# Altium PCB motorvezerlo.PcbDoc
Units mm, origin at the board's own origin, x right, y up, seen from the top; angles counter-clockwise.
Board outline 102.49 x 59.18 mm, 2 copper layers (Top Layer, Bottom Layer), stack 1.586 mm thick; 35 components, 23 nets, 92 pads, 57 vias.
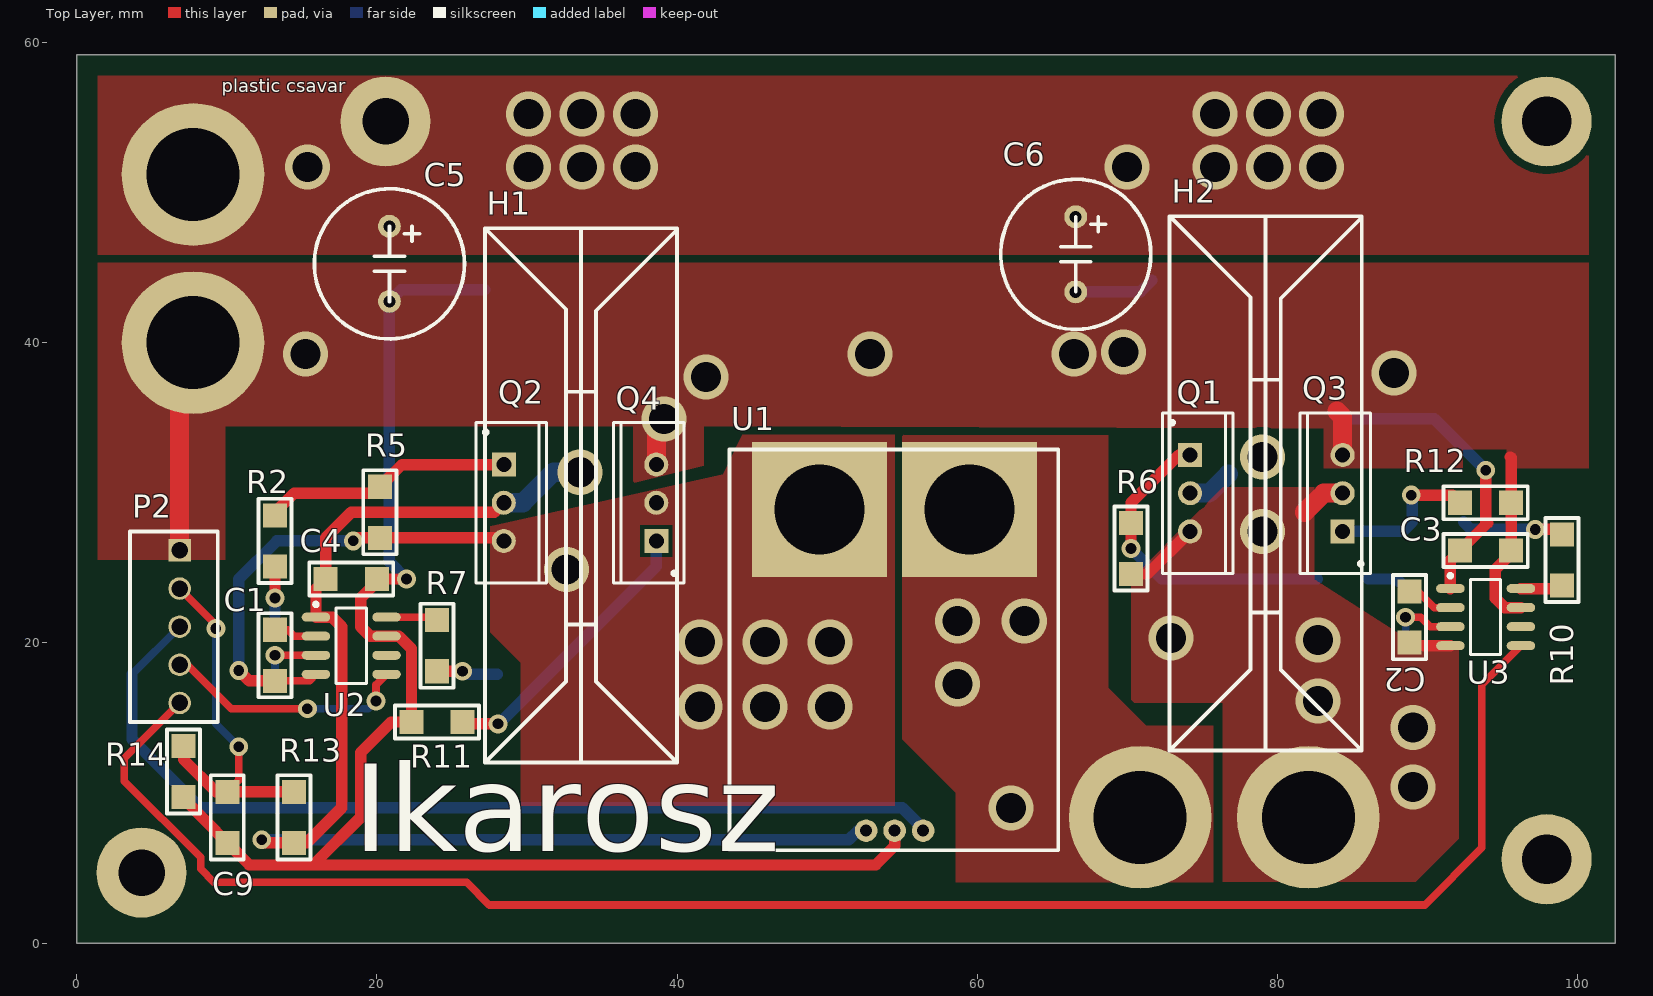
[diagram p0: Top Layer view]
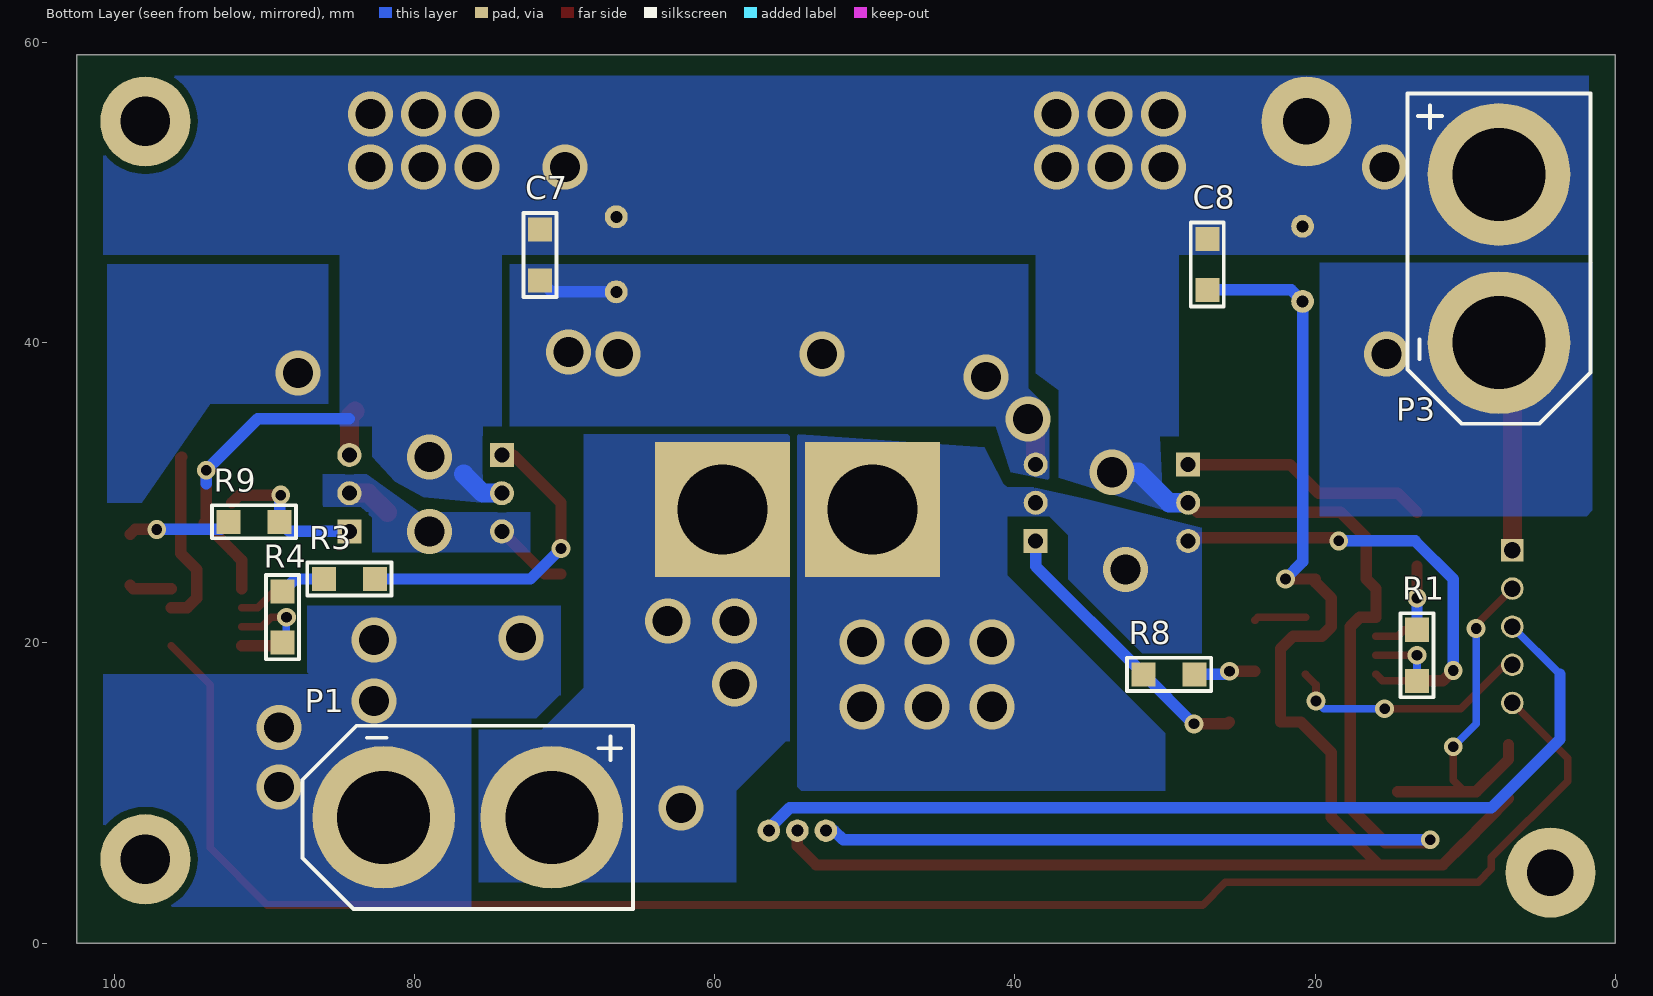
[diagram p1: Bottom Layer view, seen from below]
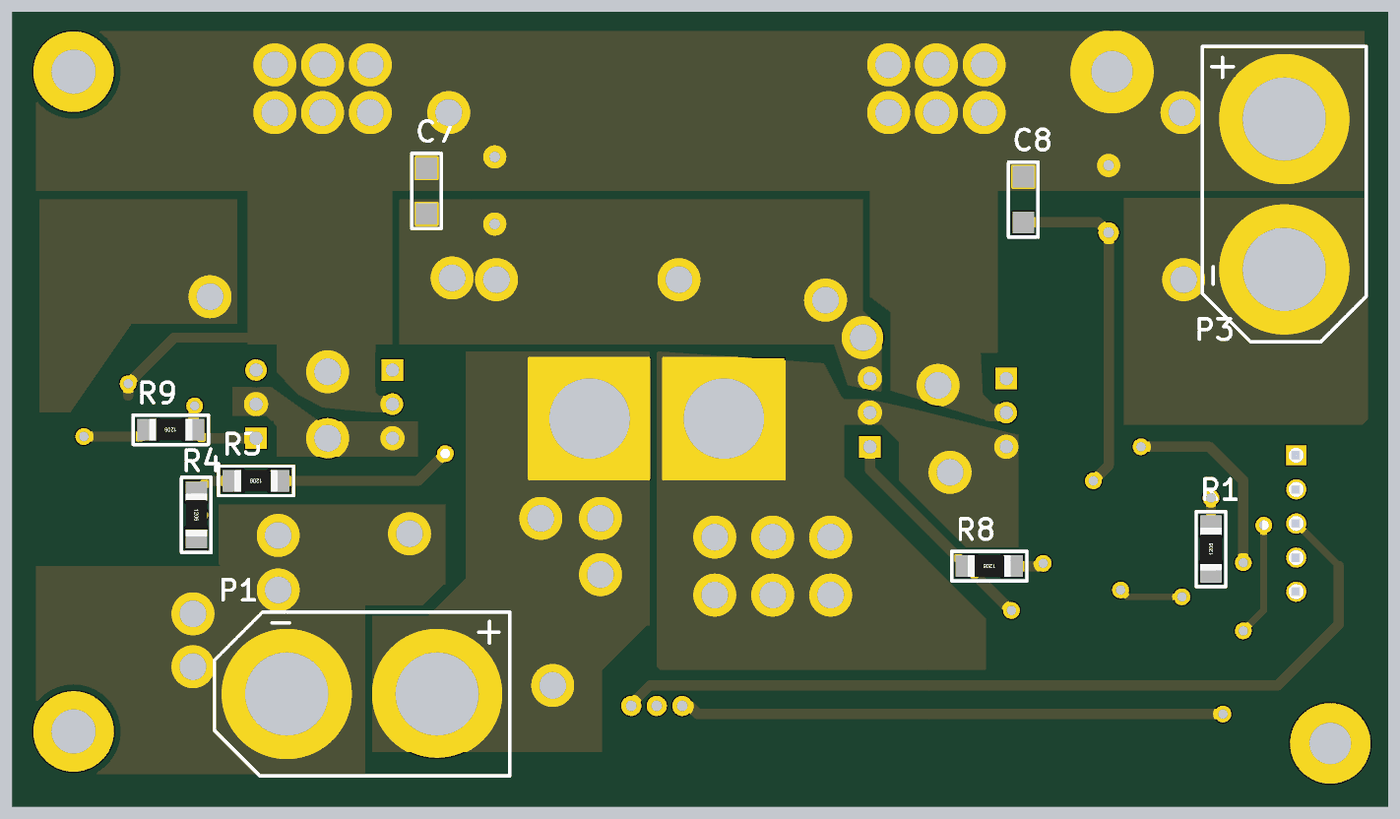
[diagram p2: 3D render of the assembled board from below, using the file's embedded part models]

## Layer stack, top to bottom
Top Solder: solder mask 0.0102, Solder Resist, Dk 3.5
Top Layer: signal copper 0.018
Dielectric1: core 1.55, FR-4, Dk 4.8
Bottom Layer: signal copper 0.018
Bottom Solder: solder mask 0.0102, Solder Resist, Dk 3.5

## Board outline
0,0 0,59.182 102.489,59.182 102.489,0

## Design rules (kind name [scope] priority, off if disabled: settings)
BoardOutlineClearance [All] p1: gap=0.25 ignorepadtopadclearanceinfootprint=FALSE except(0: Arc-SplitContinuation Track-SplitContinuation SMDPad-SplitContinuation THPad-SplitContinuation Via-SplitContinuation Fill-SplitContinuation Poly-SplitContinuation Region-SplitContinuation Text-SplitContinuation)
Clearance Clearance_4 [InNamedPolygon('Motor2')] p1: gap=0.5 ignorepadtopadclearanceinfootprint=FALSE
Clearance Clearance_3 [InNamedPolygon('MVCC')] p2: gap=0.5 ignorepadtopadclearanceinfootprint=FALSE
Clearance Clearance_2 [InNamedPolygon('Motor1')] p3: gap=0.254 ignorepadtopadclearanceinfootprint=FALSE except(0: Arc-Hole Track-Hole SMDPad-Hole THPad-Hole Via-Hole Fill-Hole Poly-Hole Region-Hole Text-Hole)
Clearance Clearance_1 [InNamedPolygon('NetP1_P')] p4: gap=0.5 ignorepadtopadclearanceinfootprint=FALSE
Clearance [InNamedPolygon('GND')] p5: gap=0.5 ignorepadtopadclearanceinfootprint=FALSE
Clearance Clearance-xPP-xTP-xTT [All] p6: gap=0.15 ignorepadtopadclearanceinfootprint=FALSE except(0: Arc-Hole Track-Hole SMDPad-Hole THPad-Hole Via-Hole Fill-Hole Poly-Hole Region-Hole Text-Hole)
ComponentClearance [All] p1: gap=0.25 collisioncheckmode=3 verticalgap=0.25 showdistances=FALSE
DiffPairsRouting [All] p1: maxlimit=0.25 minlimit=0.25 mostfreqgap=0.25 toplayer_minwidth=0.381 toplayer_maxwidth=0.381 toplayer_prefwidth=0.381 bottomlayer_minwidth=0.381 bottomlayer_maxwidth=0.381 bottomlayer_prefwidth=0.381 maxuncoupledlength=12.5
Height [All] p1: minheight=0 maxheight=25 prefheight=12.5
HoleSize HoleSize-PTH [All] p1: absolutevalues=TRUE maxlimit=2 minlimit=0.25 maxpercent=80.000 minpercent=20.000
HoleToHoleClearance [All] p1: gap=0.35 allowstackedmicrovias=TRUE
MinimumAnnularRing "Minimum IAR  >0.45mm" [((ObjectKind = 'Pad') OR (ObjectKind = 'Via')) And (Layer = 'MultiLayer') And (HoleDiameter > AsMM(0.45))] p1: minimumring=0.175 // minimum inner annular ring for pads > 0.45mm finished hole size
MinimumAnnularRing "Minimum IAR <=0.45mm" [((ObjectKind = 'Pad') OR (ObjectKind = 'Via')) And (Layer = 'MultiLayer') And (HoleDiameter <= AsMM(0.45))] p2: minimumring=0.175 // minimum inner annular ring for pads <= 0.45mm finished hole size
MinimumSolderMaskSliver [All] p1: minsoldermaskwidth=0.08
PlaneClearance PlaneClearance-IPI [All] p1: clearance=0.25
PlaneConnect [All] p1: planeconnectstyle=Direct reliefexpansion=0.175 reliefentries=4 reliefconductorwidth=0.2 reliefairgap=0.2
PolygonConnect PolygonConnect_5 [All vs IsNamedPolygon('Motor1')] p1: connectstyle=Direct reliefconductorwidth=0.254 reliefentries=4 polygonreliefangle="90 Angle" airgapwidth=0.254
PolygonConnect PolygonConnect_4 [All vs IsNamedPolygon('NetP1_P')] p2: connectstyle=Direct reliefconductorwidth=0.254 reliefentries=4 polygonreliefangle="90 Angle" airgapwidth=0.254
PolygonConnect PolygonConnect_3 [All vs IsNamedPolygon('Motor1')] p3: connectstyle=Direct reliefconductorwidth=0.254 reliefentries=4 polygonreliefangle="90 Angle" airgapwidth=0.254
PolygonConnect PolygonConnect_2 [All vs IsNamedPolygon('Motor2')] p4: connectstyle=Direct reliefconductorwidth=0.254 reliefentries=4 polygonreliefangle="90 Angle" airgapwidth=0.254
PolygonConnect PolygonConnect_1 [All vs IsNamedPolygon('GND')] p5: connectstyle=Direct reliefconductorwidth=0.254 reliefentries=4 polygonreliefangle="90 Angle" airgapwidth=0.254
PolygonConnect [All vs IsNamedPolygon('MVCC')] p6: connectstyle=Direct reliefconductorwidth=0.254 reliefentries=4 polygonreliefangle="90 Angle" airgapwidth=0.254
PolygonConnect PolygonConnect-xTW [All] p7: connectstyle=Direct reliefconductorwidth=0.2 reliefentries=4 polygonreliefangle="90 Angle" airgapwidth=0.2
RoutingCorners [All] p1: cornerstyle=45-Degree minsetback=2.5 maxsetback=2.5
RoutingVias "RoutingVias > 0.45mm" [(ObjectKind = 'Via') And (HoleDiameter > AsMM(0.45))] p1: holewidth=0.5 width=0.85 viastyle="Through Hole" minholewidth=0.5 minwidth=0.85 maxholewidth=3 maxwidth=4 // finishet hole size > 0.45mm
RoutingVias "RoutingVias <= 0.45mm" [(ObjectKind = 'Via') And (HoleDiameter <= AsMM(0.45))] p2: holewidth=0.3 width=0.65 viastyle="Through Hole" minholewidth=0.25 minwidth=0.6 maxholewidth=0.45 maxwidth=0.8 // finishet hole size <= 0.45mm
SilkToSilkClearance [All] p1: silktosilkclearance=0.2
SilkToSolderMaskClearance SilkscreenOverComponentPads [IsPad] p1: minsilkscreentomaskgap=0.2 clearancetoexposedcopper=TRUE
SolderMaskExpansion [All] p1: expansion=0.1
UnRoutedNet [All] p1: checkbadconnections=TRUE
Width Width-xTW [All] p1: maxlimit=1.5 minlimit=0.15 preferedwidth=0.2
18 further rules are at their usual default settings.

## Components (designator, comment, footprint, x,y, rotation, side; value= is the part's Value field where it differs from the comment)
C1 "220nF" FP_1206_CAP_125 13.208,19.177 r90 top
C2 "220nF" FP_1206_CAP_125 88.773,21.717 r270 top
C3 "4u7" FP_1206_CAP_125 93.853,26.162 r180 top
C4 "4u7" FP_1206_CAP_125 18.288,24.257 r180 top
C5 "220uF" THT_ELKO_10x16 20.828,47.752 r270 top
C6 "220uF" THT_ELKO_10x16 66.548,48.387 r270 top
C7 "4u7" FP_1206_CAP_125 71.628,45.847 r90 bottom
C8 "4u7" FP_1206_CAP_125 27.178,45.212 r90 bottom
C9 "68nF" FP_1206_CAP_125 10.033,8.382 r90 top
H1 "TO220_Heatsink" TO220_HEATSINK 39.993,12.027 r90 top
H2 "TO220_Heatsink" TO220_HEATSINK 85.598,12.827 r90 top
P1 "Motor" CONN_XT90 82.042,8.382 r180 bottom
P2 "Mainboard" FP_CONN5_TAP_254MM 6.858,26.162 r180 top
P3 "Motor akksi" CONN_XT90 7.747,40.005 r90 bottom
Q1 "AUIRF1324" TO-220AB 74.168,29.972 r270 top
Q2 "AUIRF1324" TO-220AB 28.448,29.337 r270 top
Q3 "AUIRF1324" TO-220AB 84.328,29.972 r90 top
Q4 "AUIRF1324" TO-220AB 38.608,29.337 r90 top
R1 "10R" FP_1206_RES 13.208,19.177 r90 bottom
R2 "0R" FP_1206_RES 13.208,26.797 r90 top
R3 "10R" FP_1206_RES 84.328,24.257 r0 bottom
R4 "0R" FP_1206_RES 88.773,21.717 r270 bottom
R5 "3K3" FP_1206_RES 20.193,28.702 r90 top
R6 "3K3" FP_1206_RES 70.231,26.289 r90 top
R7 "10R" FP_1206_RES 24.003,19.812 r270 top
R8 "0R" FP_1206_RES 29.718,17.907 r0 bottom
R9 "10R" FP_1206_RES 90.678,28.067 r0 bottom
R10 "0R" FP_1206_RES 98.933,25.527 r270 top
R11 "3K3" FP_1206_RES 24.003,14.732 r0 top
R12 "3K3" FP_1206_RES 93.853,29.337 r180 top
R13 "43K" FP_1206_RES 14.478,8.382 r270 top
R14 "27K" FP_1206_RES 7.112,11.43 r90 top
U1 "ACS758LCB-100B" ACS758LCB-5pin-PFF 54.483,7.493 r0 top
U2 "MIC4605-2" FP_SOIC8_N 18.288,19.812 r0 top
U3 "MIC4605-2" FP_SOIC8_N 93.853,21.717 r0 top

## Footprints (in the part's own frame and the unit in brackets; to place one, negate y for a bottom-side part, rotate by r counter-clockwise, add the part's x,y. Pads: shape width x height; smd on the part's side, far side on the other; paste and mask are expansions set on the pad)
ACS758LCB-5pin-PFF [mm]
  round 1.5 hole 0.8: 1(-1.9,0) 2(0,0) 3(1.9,0)
  rect 9x9 hole 6: 4(5,21.4) 5(-5,21.4)
  silkscreen extent -11,-1.3 10.9,25.4
CONN_XT90 [mm]
  round 9.5 hole 6.2: N(0,0) P(11.2,0)
  silkscreen extent -5.4,-6.1 16.6,6.1
FP_1206_CAP_125 [mm] "1206 kapacitás 1.25 mm"
  rect 1.6x1.6 smd: 1(-1.7,0) 2(1.7,0)
  silkscreen extent -2.8,-1.1 2.8,1.1, body extent -1.52,-0.79 1.58,0.79, height 1.25
FP_1206_RES [mm] "1206 ellenállás"
  rect 1.6x1.6 smd: 1(-1.7,0) 2(1.7,0)
  silkscreen extent -2.8,-1.1 2.8,1.1, body extent -1.6,-0.8 1.6,0.8, height 0.62
FP_CONN5_TAP_254MM [mm] "álló öt pólusú tápcsatlakozó 2.54mm"
  rect 1.5x1.5 hole 1.1: 1(0,0)
  round 1.5 hole 1.1: 2(0,2.54) 3(0,5.08) 4(0,7.62) 5(0,10.16)
  silkscreen extent -2.54,-1.27 3.3,11.43, body extent -2.54,-1.27 3.26,11.43, height 11.56
FP_SOIC8_N [mm]
  oval 1.9x0.6 smd: 1(-2.35,1.905) 2(-2.35,0.635) 3(-2.35,-0.635) 4(-2.35,-1.905) 5(2.35,-1.905) 6(2.35,-0.635) 7(2.35,0.635) 8(2.35,1.905)
  silkscreen extent -2.47,-2.5 1,2.88, body extent -2,-2.5 2,2.5, height 1.75
THT_ELKO_10x16 [mil]
  round 60 hole 31.5: N(196.85,0) P(0,0)
  silkscreen extent -98,-197 295,197
TO220_HEATSINK [mm]
  silkscreen extent 0,0 35.6,12.8
TO-220AB [mm] "TO, Thru-Hole, Vertical, Heatsink Mounted; 3 In-Line Leads; Pitch 2.54 mm"
  rect 1.6x1.6 hole 1: 1(-2.54,0)
  round 1.6 hole 1: 2(0,0) 3(2.54,0)
  silkscreen extent -5.35,-1.85 5.35,2.85, body extent -5.4,-1.9 5.4,2.9, height 19.3

## Part data
C1 C2 C3 C4 C7 C8 C9: library part CAP, "Capacitor", Supplier=Lomex
  C1 C2: Name="220nF 1206 10% 50V X7R CL31B224KBFNNNE (SAM)", Reference=82-09-87
  C3 C4 C7 C8: Name="4.7uF 1206 10% 25V X7R CL31B475KAHNNNE (SAM)", Reference=82-06-22
  C9: Name="68nF 1206 10% 50V X7R CC1206KRX7R9BB683 (YAG)", Reference=82-00-17
C5 C6: library part CAP_ELECT, "Polarized Capacitor", Name="220uF 50V 10x16 RM 5.0 20% 105° 10000h KTC227M050S1G6H16K (TEA) LOW ESR & IMP. HIGH RIPPLE, LONG LIFE", Reference=12-21-33, Supplier=Lomex
H1 H2: "TO220 Heatsink", Name="HÛTÕBORDA TO-220 35.6x 25.4x12.8mm ALUPROFIL ELOXÁLT", Reference=22-00-40, Supplier=Lomex
P1 P3: library part Connector_2pinPolarized, "2 pin polarized connector"
P2: library part Connector_5pin, "5pin Connector"
Q1 Q2 Q3 Q4: library part NMOS, "NXP - BSP030,115 - MOSFET, N CH, 30V, 10A, SOT223", Name="AUIRF1324 -  MOSFET Transistor, N Channel, 195 A, 24 V, 0.0012 ohm, 10 V, 2 V", Reference=1865599, Supplier=Farnell
R1 R2 R3 R4 R5 R6 R7 R8 R9 R10 R11 R12 R13 R14: library part RES, "Resistor", Supplier=Lomex
  R1 R3 R7 R9: Name="3R90 1206 1% WR12W3R90FTL 0.25W (WAL)", Reference=80-24-67
  R2 R4 R8 R10: Name="0R00 1206 CR-06JL7----0R 0.25W (VIK) Iav=2", Reference=81-10-03
  R5 R6 R11 R12: Name="3K30 1206 1% WR12X3301FTL 0.25W (WAL)", Reference=80-20-37
  R13: Name="43K0 1206 1% WR12X4302FTL 0.25W (WAL)", Reference=80-42-96
  R14: Name="27K0 1206 1% CR-06FL7---27K 0.25W (VIK)", Reference=80-10-43
U1: "ACS758LCB", Name="ACS758LCB-100B-PFF-T -  Current Sensor, Current Conductor, 10 mA, 120 kHz, PFF, 5 Pins, 3 V, 5.5 V", Reference=1791393, Supplier=Farnell
U2 U3: "MOSFET driver half brifge", Name="MIC4605-2YM -  MOSFET Driver, Half Bridge, 5.5V-16V supply, SOIC-8", Reference=2510169, Supplier=Farnell

## Free pads (board coordinates)
  round 6 hole 3.1: 0(4.318,4.699) 0(20.574,54.737)
  round 6 hole 3.3: 0(97.917,5.588) 0(97.917,54.737)

## Via types
v1: diameter 3, hole 2, Top Layer to Bottom Layer, 40 vias
v2: diameter 1.25, hole 0.711, Top Layer to Bottom Layer, 17 vias

## Nets (pads, with @x,y where several pads share a name; then routed paths per layer and width w, separated by ;. In a path a pad name is that pad's centre, name@x,y a point inside that pad or via, vN(x,y) a via of type N, cw(c..) or ccw(c..) an arc to the next point about the centre after c; other vN are vias at no path point)
GND: C3.1 C4.1 C5.N C6.N C7.1 C8.1 C9.1 P2.1 P3.N Q3.3 Q4.3 R11.1 R12.1 R14.1 U1.2 U2.7 U3.7 | length 141.6
  Top Layer w0.762: R14.1@7.112,9.652 C9.1 11.508,5.207 15.748,5.207 ; v2(21.971,24.257) C4.1 19.988,24.052 18.923,22.987 18.923,21.082 19.558,20.447 U2.7 21.463,20.447 22.303,19.607 R11.1 20.955,14.732 18.923,12.7 18.923,8.382 15.748,5.207 ; U1.2 54.483,6.477 53.213,5.207 15.748,5.207 ; 95.504,32.385 95.553,32.336 R12.1 C3.1 95.553,25.957 94.488,24.892 94.488,22.987 95.123,22.352 U3.7
  Top Layer w1.27: P2.1 6.858,37.592 P3.N@8.763,39.497 ; Q4.3 38.608,34.417 v1(39.116,34.925) ; 83.947,35.433 84.328,35.052 Q3.3
  Bottom Layer w0.762: v2(21.971,24.257) 20.828,25.4 C5.N 21.588,43.512 C8.1 ; C6.N 70.868,43.387 C7.1
  other v1: 41.91,37.719 87.757,37.973 15.24,39.243 52.832,39.243 66.421,39.243 69.723,39.37
MAccu_U: C9.2 P2.2 R13.1 R14.2 | length 24.7
  Top Layer w0.508: P2.2 9.271,21.209 v2(9.271,20.955) ; C9.2 10.795,10.844 v2(10.795,13.081)
  Top Layer w0.762: R14.2@7.112,13.208 R14.2 7.112,12.241 9.271,10.082 C9.2 R13.1
  Bottom Layer w0.508: v2(9.271,20.955) 9.271,14.605 v2(10.795,13.081)
Motor1: C1.1 Q2.3 Q4.2 R5.1 U1.5 U2.4 | length 30.6
  Top Layer w0.508: C1.1 15.508,17.477 U2.4
  Top Layer w0.762: v2(10.795,18.161) 11.479,17.477 C1.1 ; v2(18.415,26.797) 18.62,27.002 R5.1 28.243,27.002 Q2.3
  Bottom Layer w0.762: v2(10.795,18.161) 10.795,24.257 13.335,26.797 v2(18.415,26.797)
  other v1: 41.529,15.748 45.847,15.748 50.165,15.748 41.529,20.066 45.847,20.066 50.165,20.066 32.639,24.892
Motor2: C2.2 P1.N Q1.3 Q3.2 R6.1 U3.4 | length 11
  Top Layer w0.762: R6.1 71.325,24.589 Q1.3 ; C2.2 88.978,19.812 U3.4
  Top Layer w1.27: 81.788,28.702 83.058,29.972 Q3.2
  other v1: 89.027,10.414 89.027,14.351 82.677,16.129 82.677,20.193 72.898,20.32 78.994,27.432
Motor_I: P2.3 U1.3 | length 64.1
  Bottom Layer w0.508: 3.683,17.907 P2.3
  Bottom Layer w0.762: 3.683,17.907 3.683,13.589 8.255,9.017 54.991,9.017 56.383,7.625 U1.3
MVCC: C3.2 C4.2 C5.P C6.P C7.2 C8.2 P3.P pad.0@20.574,54.737 Q1.2 Q2.2 R13.2 U1.1 U2.1 U3.1 | length 109.8
  Top Layer w0.762: v2(12.319,6.887) 12.524,6.682 R13.2 15.318,6.682 17.653,9.017 17.653,21.082 17.018,21.717 U2.1 15.938,23.607 C4.2 16.588,27.002 18.288,28.702 27.813,28.702 Q2.2 ; U3.1 91.503,25.512 C3.2 93.98,27.989 93.853,28.116 v2(93.853,31.496)
  Bottom Layer w0.762: v2(12.319,6.887) 51.435,6.887 52.041,7.493 U1.1 ; 84.328,34.925 90.424,34.925 v2(93.853,31.496) 93.853,30.607
  Bottom Layer w1.27: Q2.2 29.718,29.337 31.75,31.369 v1(33.528,31.369) 33.909,31.369 v1@34.163,31.623 ; Q1.2 75.438,29.972 76.708,31.242
  other v1: 78.994,32.385 15.367,51.689 30.099,51.689 33.655,51.689 37.211,51.689 69.977,51.689 75.819,51.689 79.375,51.689 82.931,51.689 30.099,55.245 33.655,55.245 37.211,55.245 75.819,55.245 79.375,55.245 82.931,55.245
NetC1_2: C1.2 U2.2 | length 2.9
  Top Layer w0.508: C1.2 14.048,20.877 14.478,20.447 U2.2
NetC2_1: C2.1 U3.2 | length 3.2
  Top Layer w0.508: C2.1 89.359,23.417 90.424,22.352 U3.2
NetP1_P: P1.P U1.4
  other v1: 62.23,9.017 58.674,17.272 58.674,21.463 63.119,21.463
NetQ1_1: Q1.1 R3.1 R6.2 | length 21.5
  Top Layer w0.762: v2(70.231,26.289) R6.2 70.231,29.337 73.406,32.512 Q1.1
  Bottom Layer w0.762: v2(70.231,26.289) 72.263,24.257 R3.1
NetQ2_1: Q2.1 R2.2 R5.2 | length 16.6
  Top Layer w0.762: R2.2@13.208,28.702 14.478,29.972 19.763,29.972 R5.2 21.668,31.877 Q2.1
NetQ3_1: Q3.1 R9.1 R12.2 | length 10.2
  Top Layer w0.762: v2(88.9,29.845) 91.645,29.845 R12.2
  Bottom Layer w0.762: Q3.1 88.343,27.432 R9.1 88.978,29.767 v2(88.9,29.845)
NetQ4_1: Q4.1 R8.2 R11.2 | length 19
  Top Layer w0.762: R11.2 25.83,14.605 v2(28.067,14.605)
  Bottom Layer w0.762: v2(28.067,14.605) 28.116,14.605 R8.2 38.608,25.097 Q4.1
NetR1_1: R1.1 U2.3 | length 4.4
  Top Layer w0.508: v2(13.208,19.177) U2.3
  Bottom Layer w0.508: R1.1 v2(13.208,19.177)
NetR1_2: R1.2 R2.1 | length 4.2
  Top Layer w0.762: v2(13.208,22.987) R2.1
  Bottom Layer w0.762: R1.2 v2(13.208,22.987)
NetR3_2: R3.2 R4.1 | length 3.1
  Bottom Layer w0.762: R3.2 87.933,24.257 R4.1
NetR4_2: R4.2 U3.3 | length 5.1
  Top Layer w0.508: v2(88.519,21.717) 89.535,21.717 90.17,21.082 U3.3
  Bottom Layer w0.508: v2(88.519,21.717) 88.519,20.271 R4.2
NetR7_1: R7.1 U2.8 | length 3.4
  Top Layer w0.508: U2.8 23.798,21.717 R7.1
NetR7_2: R7.2 R8.1 | length 4.1
  Top Layer w0.762: R7.2 v2(25.703,18.112)
  Bottom Layer w0.762: v2(25.703,18.112) 25.908,17.907 R8.1
NetR9_2: R9.2 R10.1 | length 6.9
  Top Layer w0.762: v2(97.155,27.559) 98.601,27.559 R10.1
  Bottom Layer w0.762: R9.2 92.886,27.559 v2(97.155,27.559)
NetR10_2: R10.2 U3.8 | length 2.8
  Top Layer w0.762: U3.8 98.728,23.622 R10.2
PWM_L: P2.4 U2.5 | length 16.6
  Top Layer w0.508: P2.4 7.366,18.542 10.287,15.621 v2(15.367,15.621) ; v2(19.939,16.129) 19.939,17.208 U2.5
  Bottom Layer w0.508: v2(15.367,15.621) 19.431,15.621 v2(19.939,16.129)
PWM_R: P2.5 U3.5 | length 117.1
  Top Layer w0.508: P2.5 3.175,12.319 3.175,10.795 8.255,5.715 8.255,4.953 9.144,4.064 25.971,4.064 27.495,2.54 89.789,2.54 93.599,6.35 93.599,17.208 U3.5
pads on no net: U2.6 U3.6

## Polygon pours and split planes (outlines as drawn)
MVCC on Top Layer "MVCC" (solid, pour order 2): 1.143,57.912 100.838,57.912 100.838,45.847 1.143,45.847
GND on Top Layer "GND" (solid, pour order 4): 1.398,45.847 100.711,45.847 100.838,45.974 100.838,34.417 100.838,31.623 95.25,31.623 95.25,32.893 92.329,32.893 92.329,31.623 83.058,31.623 83.058,34.293 41.783,34.417 41.783,31.798 37.084,30.655 37.084,34.417 9.906,34.417 9.906,25.527 1.398,25.527 1.14,34.293
Motor1 on Top Layer "Motor1" (solid, pour order 26): 54.483,33.851 54.483,9.144 29.591,9.144 29.591,18.669 27.559,20.701 27.559,27.755 43.053,31.242 44.323,33.851
Motor2 on Top Layer "Motor2" (solid, pour order 30): 70.231,16.002 76.327,16.002 76.327,4.09 89.202,4.09 92.075,6.963 92.075,16.637 92.075,19.915 89.202,19.915 82.423,24.257 82.423,30.353 76.327,30.353 70.231,24.257
NetP1_P on Top Layer "NetP1_P" (solid, pour order 28): 54.991,33.909 68.707,33.909 68.707,17.018 71.247,14.478 75.692,14.478 75.692,4.064 58.547,4.064 58.547,10.033 54.991,13.589
GND on Bottom Layer "GND" (solid, pour order 56): 1.524,45.339 19.685,45.339 19.685,28.448 1.905,28.448 1.524,28.829
GND on Bottom Layer "GND" (solid, pour order 54): 85.725,45.212 100.457,45.212 100.457,29.337 100.203,29.337 98.171,29.337 93.599,35.941 85.725,35.941
GND on Bottom Layer "GND" (solid, pour order 52): 39.116,45.212 73.66,45.212 73.66,34.417 41.275,34.417 40.259,31.369 37.719,30.861 37.719,35.56 39.116,36.957
MVCC on Bottom Layer "MVCC" (solid, pour order 8): 84.963,57.912 74.168,57.912 74.168,34.417 75.438,34.417 75.438,29.337 79.375,29.718 81.28,30.734 82.804,32.385 82.804,34.417 84.963,34.417
MVCC on Bottom Layer "MVCC" (solid, pour order 6): 38.608,57.912 29.083,57.912 29.083,33.782 30.353,33.782 30.099,28.829 37.084,30.988 37.084,36.83 38.608,37.973
MVCC on Bottom Layer "MVCC" (solid, pour order 10): 100.838,57.912 1.778,57.912 1.778,45.847 100.838,45.847
Motor1 on Bottom Layer "Motor1" (solid, pour order 38): 54.483,33.909 42.037,33.02 40.767,30.607 40.513,30.353 38.735,30.353 38.735,28.448 40.513,28.448 40.513,24.511 29.972,13.97 29.972,10.16 54.229,10.16 54.483,10.414
NetP1_P on Bottom Layer "NetP1_P" (solid, pour order 42): 68.707,33.909 55.118,33.909 54.991,33.782 54.991,13.462 55.245,13.462 58.547,10.16 58.547,4.064 75.692,4.064 75.692,14.224 71.501,14.224 68.707,17.018
Motor2 on Bottom Layer "Motor2" (solid, pour order 44): 76.2,2.413 100.711,2.413 100.838,2.54 100.838,17.907 86.995,17.907 87.122,18.034 87.122,22.479 70.231,22.479 70.231,16.51 70.358,16.51 71.882,14.986 76.2,14.986
Motor1 on Bottom Layer "Motor1" (solid, pour order 48): 38.735,30.353 35.306,29.591 27.559,27.686 27.559,19.304 31.496,19.304 36.449,24.257 36.449,27.178 37.719,28.448 38.735,28.448
Motor2 on Bottom Layer "Motor2" (solid, pour order 50): 72.263,28.702 79.629,28.702 83.185,31.242 86.106,31.242 86.106,29.21 86.233,29.083 83.566,29.083 82.804,28.321 82.804,26.035 72.263,26.035

## Silkscreen, mask and mechanical layers (free items; w line width, h text height)
Top Overlay:
  text "plastic csavar" at 9.652,56.388 h1.5
  text "Ikarosz" at 18.415,4.191 h10
Top Solder:
  lines w5: 7.747,51.205 8.231,51.689 ; 70.842,8.382 70.842,10.184
Mechanical 1:
  lines w0.508: 0.508,0.889 101.981,0.889 101.981,58.801 0.508,58.801 0.508,0.889